# Altium PCB VFD_controller.PcbDoc
Units mm, origin at the board's own origin, x right, y up, seen from the top; angles counter-clockwise.
Board outline 57.92 x 97.6 mm, 4 copper layers (L1, GND, PWR, L2), stack 1.57 mm thick; 61 components, 83 nets, 293 pads, 89 vias.
Unrouted connection lines stored in the file: 5.
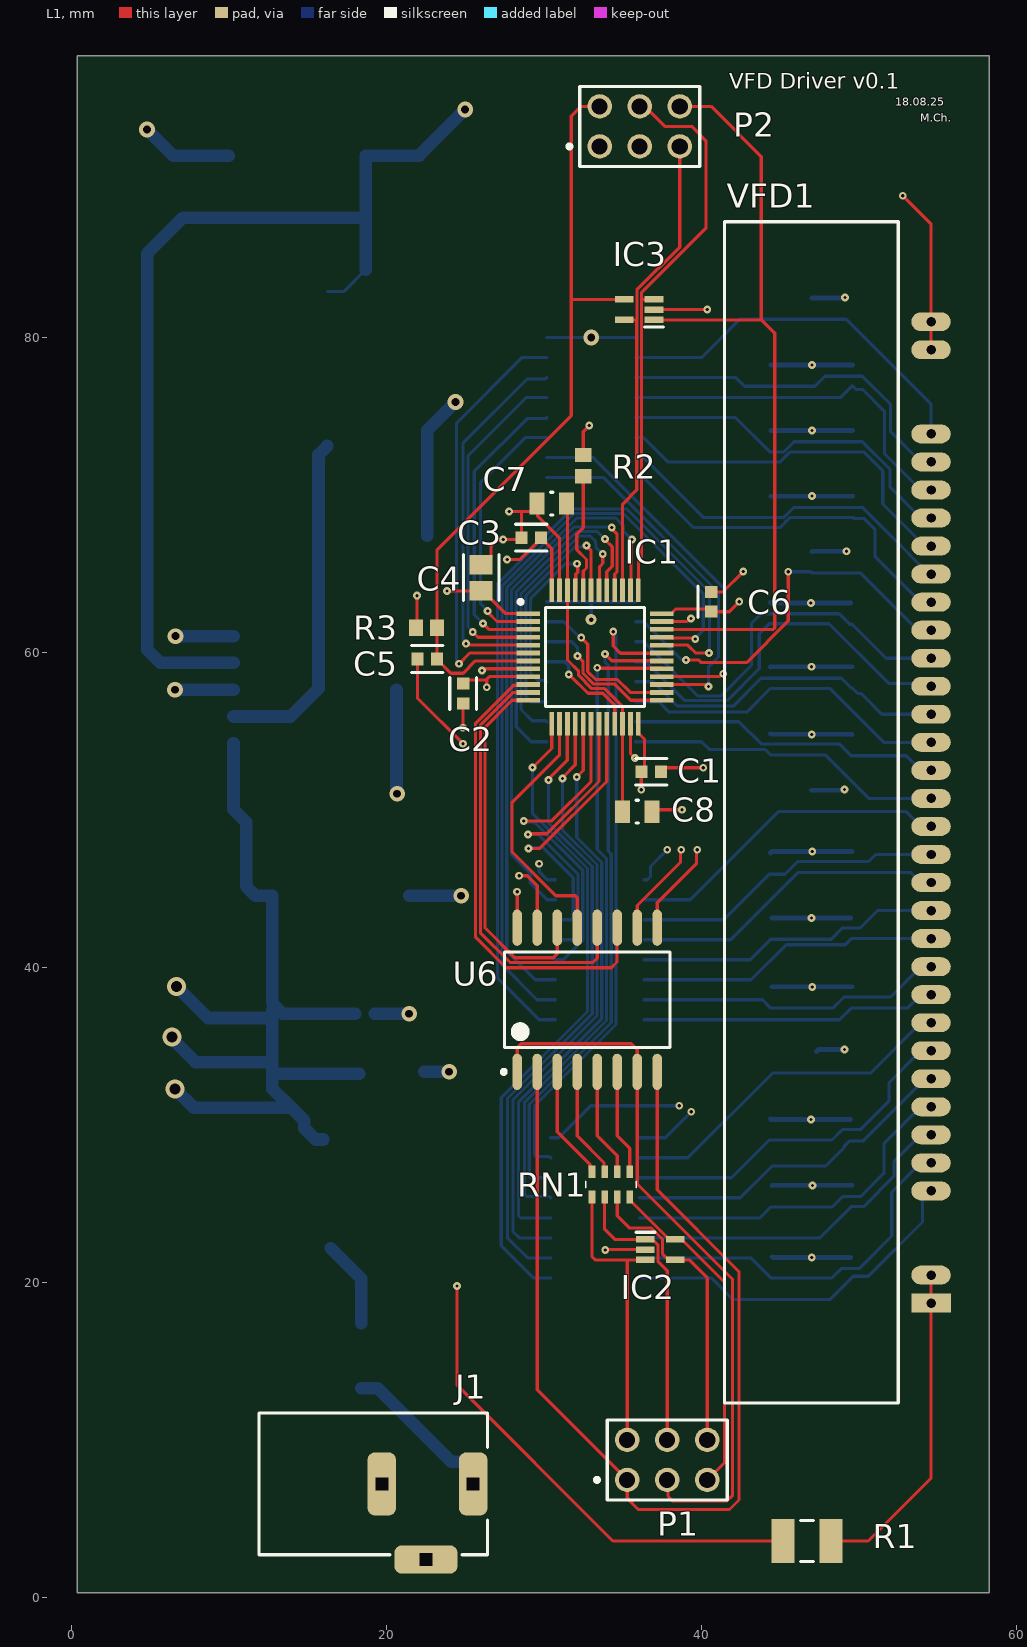
[diagram p0: L1 view]
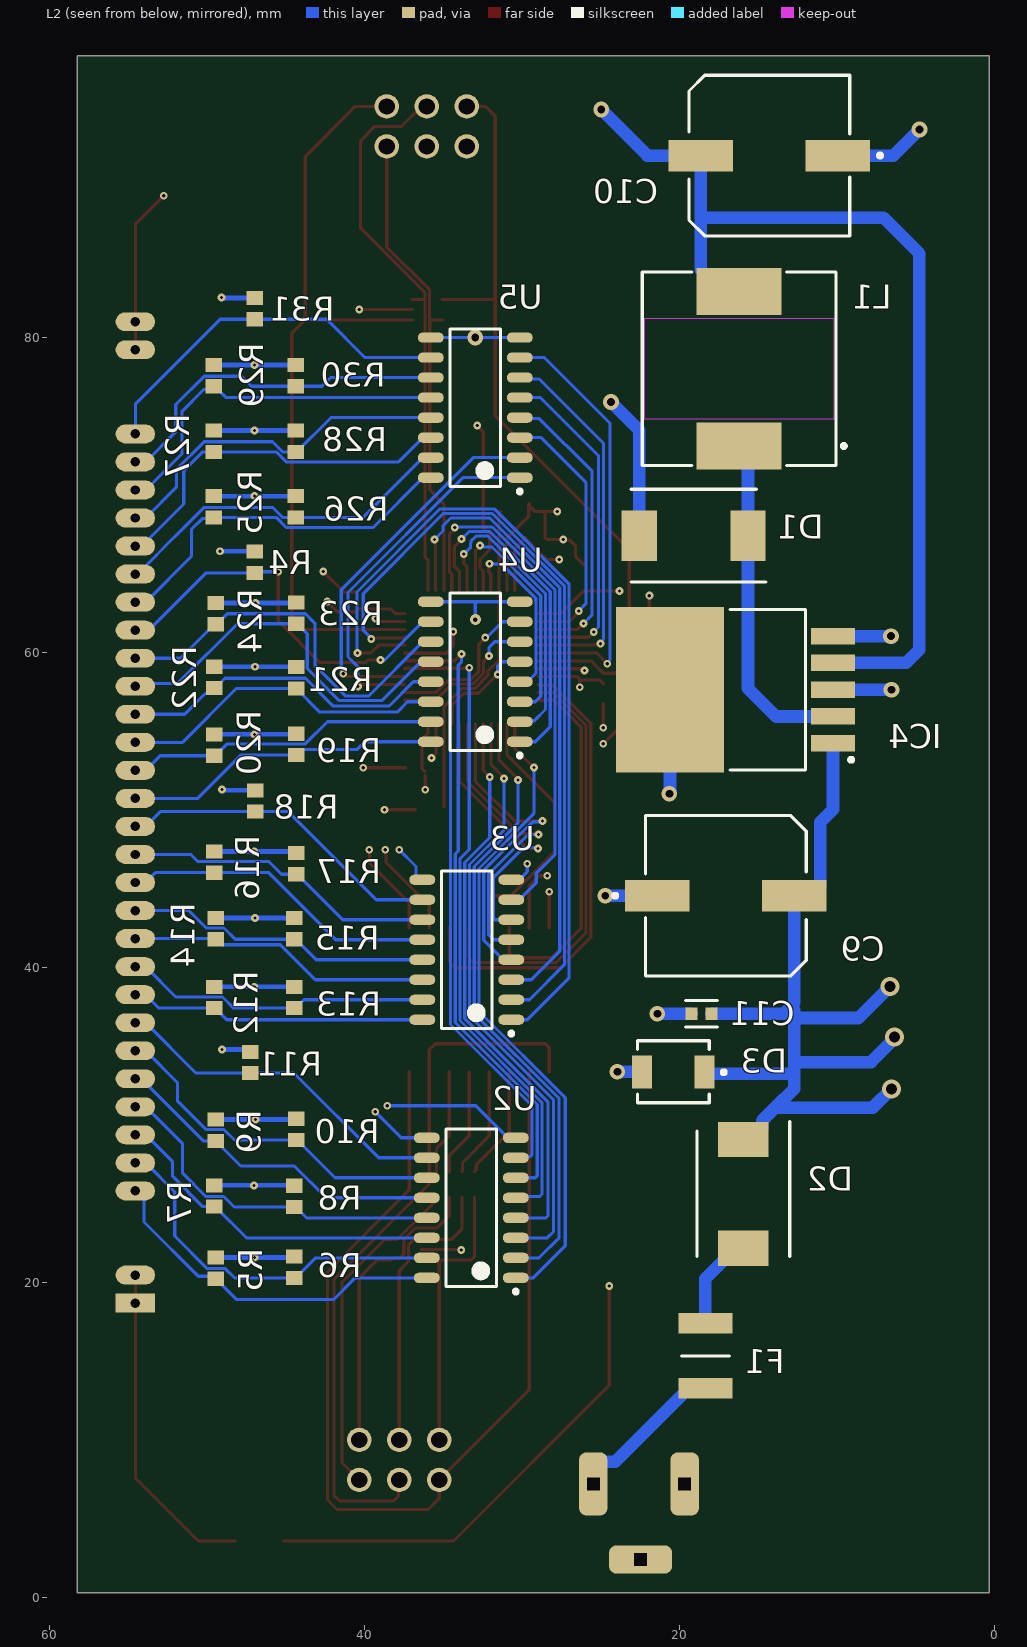
[diagram p1: L2 view, seen from below]
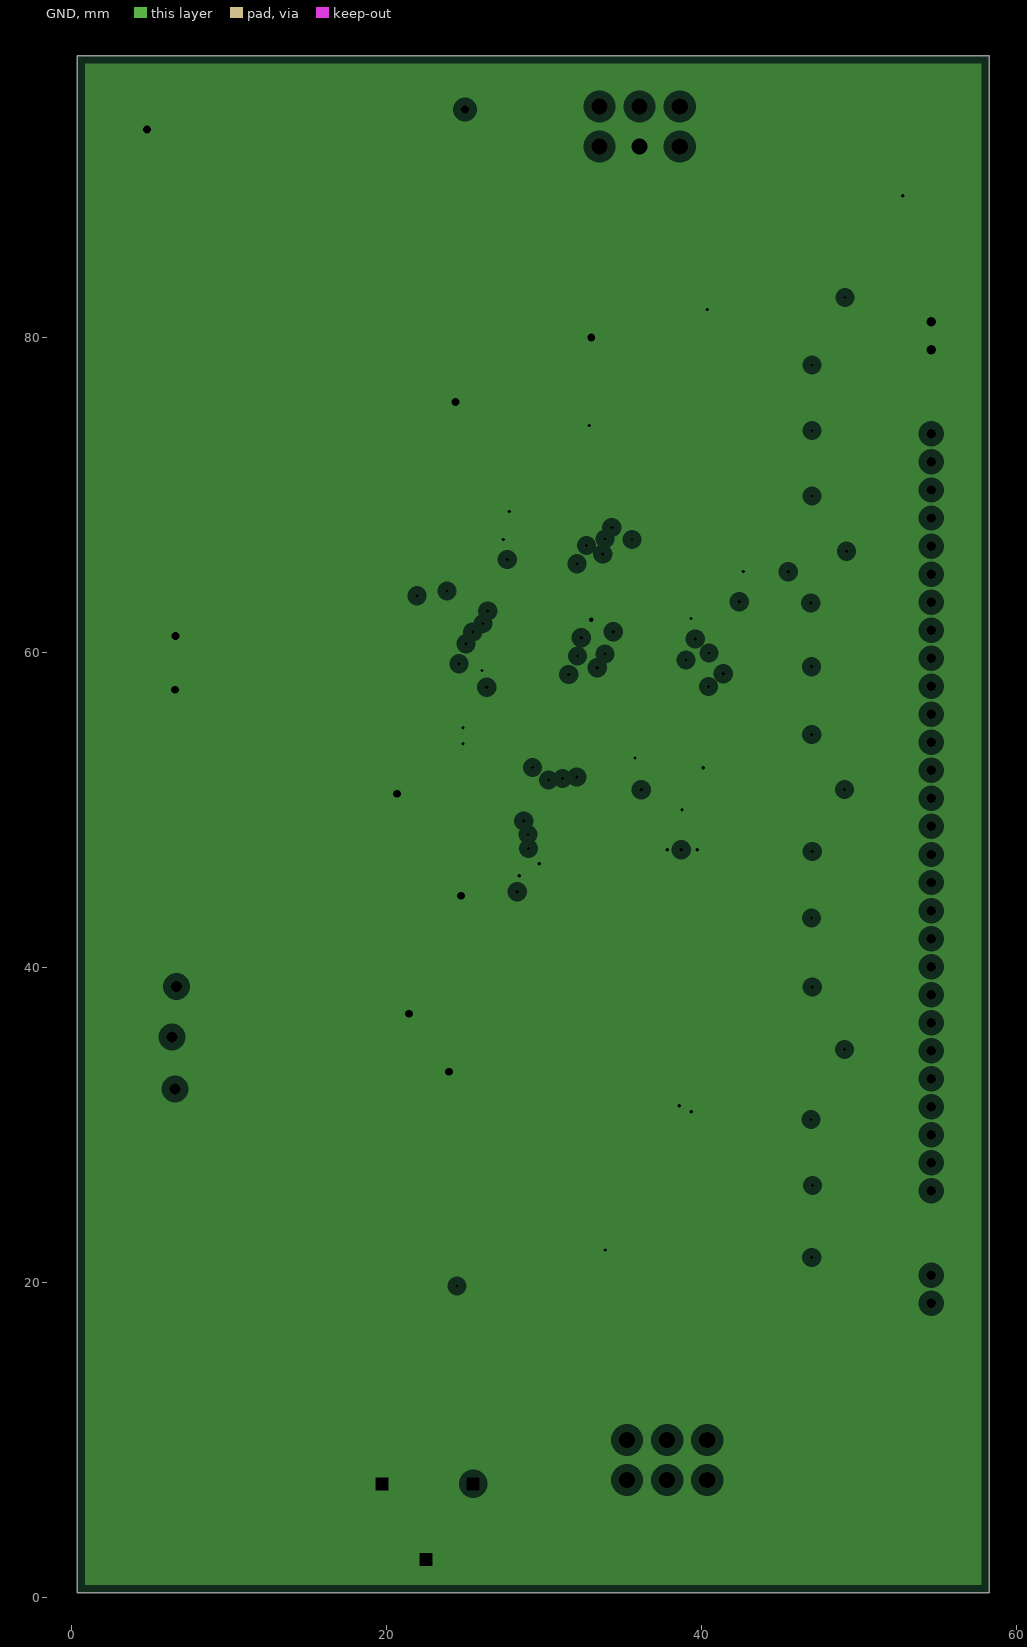
[diagram p2: GND, clearances drawn from the general rule]
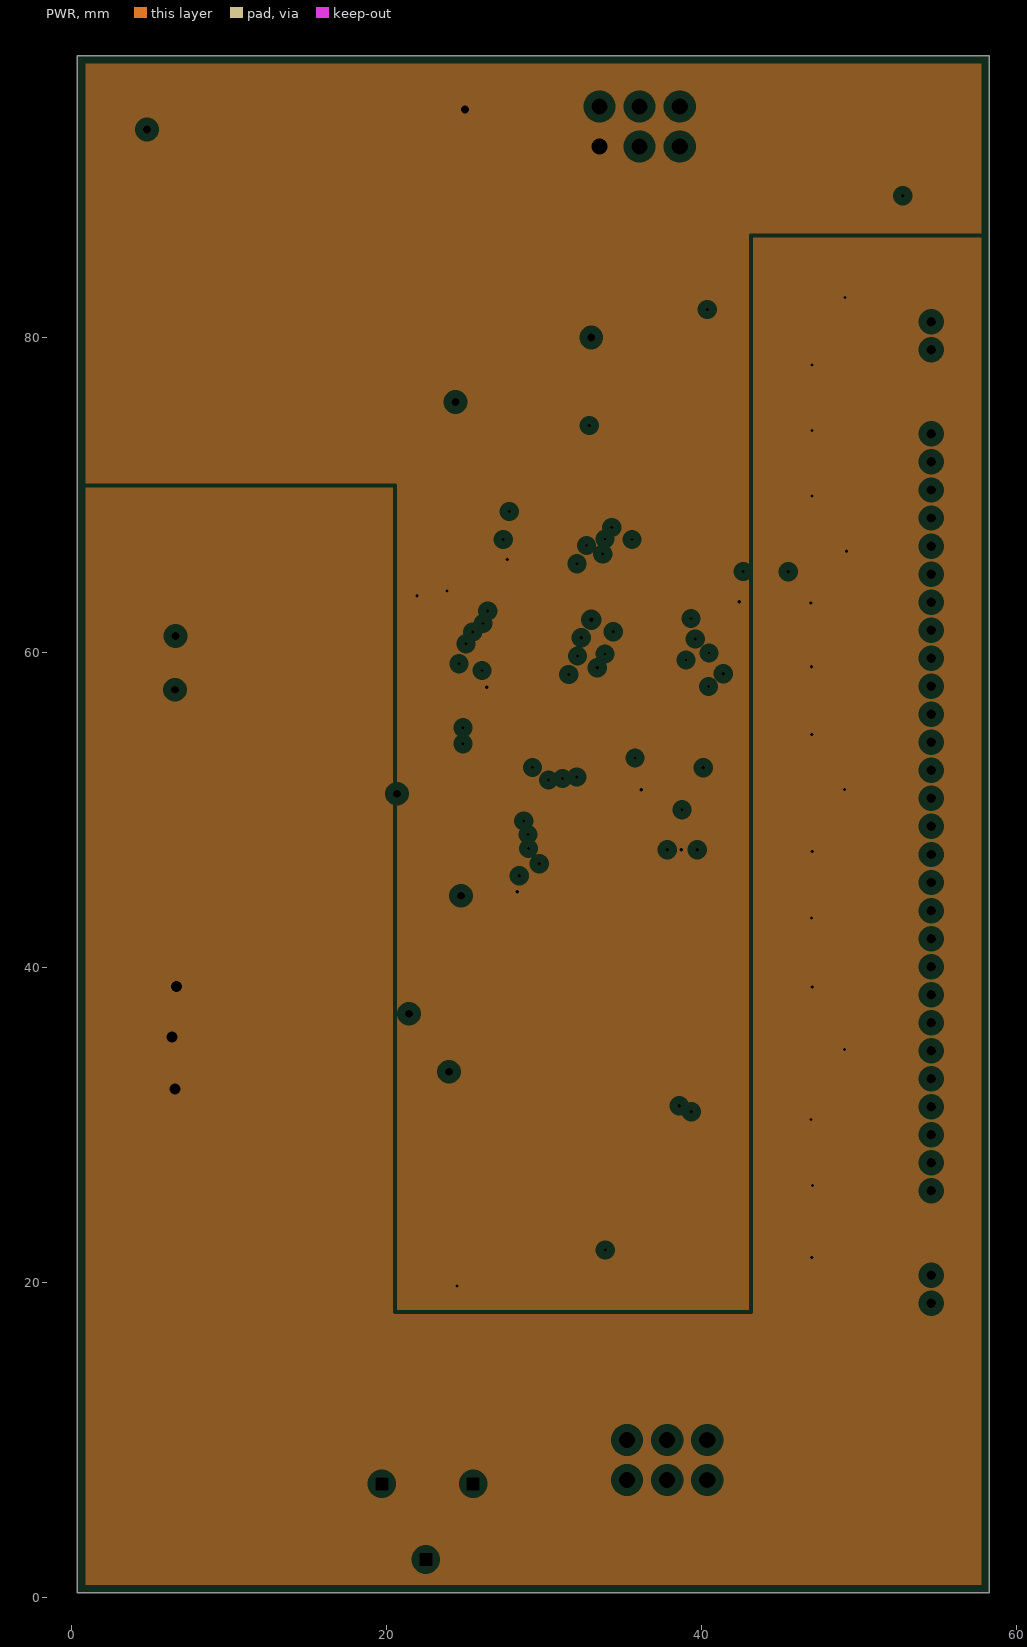
[diagram p3: PWR, clearances drawn from the general rule]
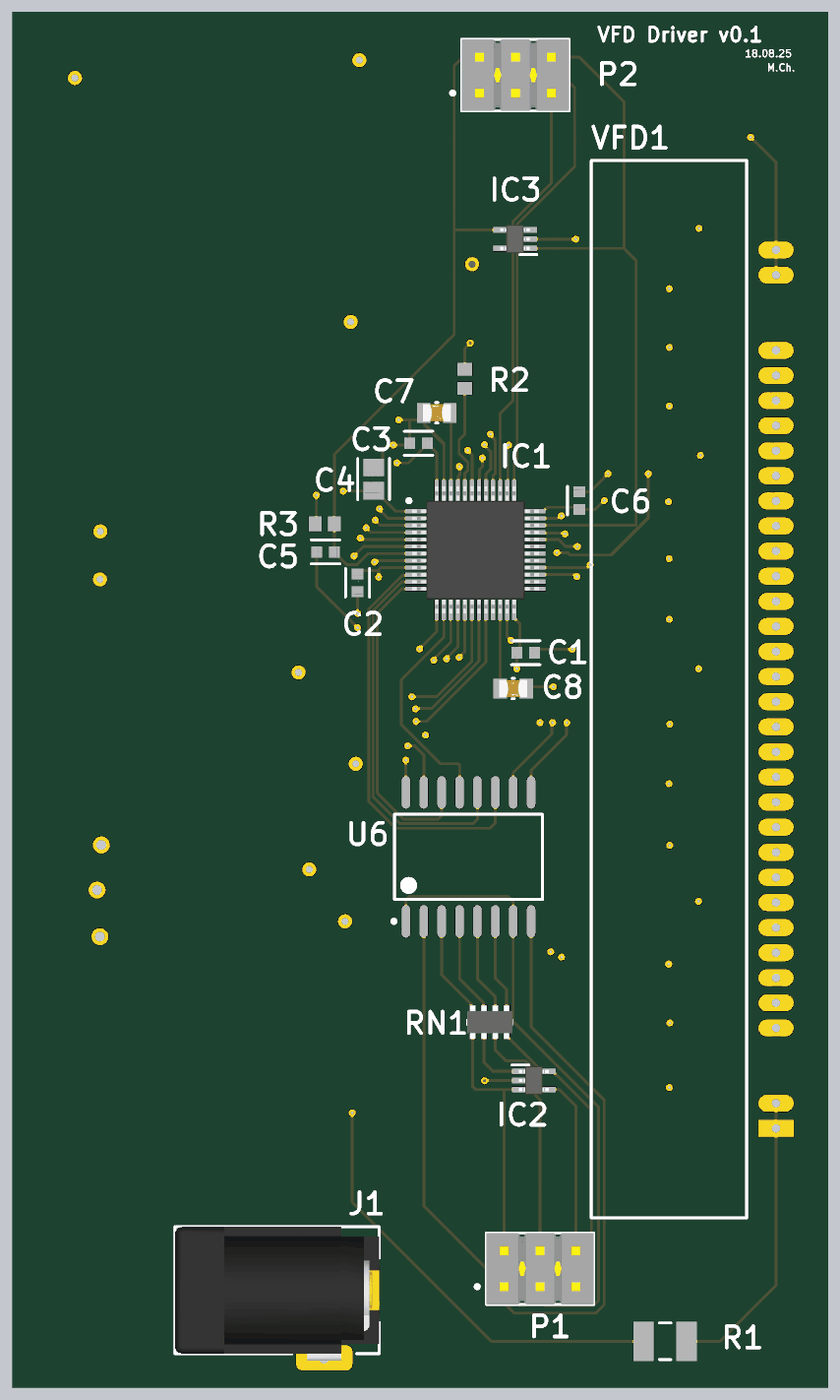
[diagram p4: 3D render of the assembled board from above, using the file's embedded part models]

## Layer stack, top to bottom
Top Solder: solder mask 0.0127, Solder Resist, Dk 3.8
L1: signal copper 0.035
Dielectric 1: prepreg 0.2, 7628, Dk 4.6
GND: plane copper 0.0175, net GND
Core: core 1.065, FR-4, Dk 4.5
PWR: plane copper 0.0175, net (Multiple Nets)
Dielectric 2: prepreg 0.2, 7628, Dk 4.6
L2: signal copper 0.035
Bottom Solder: solder mask 0.0127, Solder Resist, Dk 3.8

## Board outline
0.349,0.27 58.268,0.27 58.268,97.87 0.349,97.87

## Design rules (kind name [scope] priority, off if disabled: settings)
BoardOutlineClearance [All] p1: gap=0.3 ignorepadtopadclearanceinfootprint=FALSE except(0.4: Arc-SplitBarrior Arc-SplitContinuation Track-SplitBarrior Track-SplitContinuation SMDPad-SplitBarrior SMDPad-SplitContinuation THPad-SplitBarrior THPad-SplitContinuation Via-SplitBarrior Via-SplitContinuation Fill-SplitBarrior Fill-SplitContinuation Poly-SplitBarrior Poly-SplitContinuation Region-SplitBarrior Region-SplitContinuation Text-SplitBarrior Text-SplitContinuation)
Clearance "Clearance Different Nets" [All] p1: gap=0.2 ignorepadtopadclearanceinfootprint=FALSE except(0.089: Arc-Arc Arc-Track Arc-SMDPad Track-Track Track-SMDPad; 0.127: SMDPad-SMDPad SMDPad-Via THPad-Via Via-Via; 0.254: Arc-Via Arc-Text Track-Via Track-Text SMDPad-Text THPad-Text Via-Text Fill-Text Poly-Text Region-Text Text-Text; 0.5: THPad-THPad Via-Hole)
Clearance "Clearance Same Nets" [All] p2: gap=0.2 ignorepadtopadclearanceinfootprint=FALSE except(0.089: Arc-Arc Arc-Track Arc-SMDPad Track-Track Track-SMDPad SMDPad-SMDPad; 0.127: SMDPad-Via THPad-Via; 0.254: Arc-Via Arc-Text Track-Via Track-Text SMDPad-Text THPad-Text Via-Via Via-Text Fill-Text Poly-Text Region-Text Text-Text)
Clearance "Clearance Bottom Layer" [OnLayer('Bottom Layer')] p3: gap=0.203 ignorepadtopadclearanceinfootprint=TRUE except(0.254: Arc-Text Track-Text SMDPad-Text THPad-Text Via-Text Fill-Text Poly-Text Region-Text Text-Text)
Clearance "Clearance Top Layer" [OnLayer('Top Layer')] p4: gap=0.203 ignorepadtopadclearanceinfootprint=TRUE except(0.254: Arc-Text Track-Text SMDPad-Text THPad-Text Via-Text Fill-Text Poly-Text Region-Text Text-Text)
HoleSize [All] p1: absolutevalues=TRUE maxlimit=6.3 minlimit=0.2 maxpercent=80.000 minpercent=20.000
MinimumAnnularRing [All] p1: minimumring=0.13
MinimumSolderMaskSliver [All] p1: minsoldermaskwidth=0.1
PlaneClearance [All] p1: clearance=0.508
PlaneConnect [All] p1: planeconnectstyle=Relief reliefexpansion=0.508 reliefentries=4 reliefconductorwidth=0.254 reliefairgap=0.254
PolygonConnect PolygonConnect_1 [All] p1: thpad.connectstyle=Relief thpad.reliefconductorwidth=0.508 thpad.reliefentries=4 thpad.polygonreliefangle="90 Angle" thpad.airgapwidth=0.254 smdpad.connectstyle=Relief smdpad.reliefconductorwidth=0.508 smdpad.reliefentries=4 smdpad.polygonreliefangle="90 Angle" smdpad.airgapwidth=0.254 via.connectstyle=Direct via.reliefconductorwidth=0.508 via.reliefentries=4 via.polygonreliefangle="90 Angle" via.airgapwidth=0.254
RoutingCorners [All] p1: cornerstyle=Round minsetback=2.54 maxsetback=2.54
RoutingVias [All] p1: holewidth=0.5 width=1 viastyle="Through Hole" minholewidth=0.2 minwidth=0.35 maxholewidth=1 maxwidth=2
SilkToSilkClearance [All] p1: silktosilkclearance=0.1
SilkToSolderMaskClearance [IsPad] p1: minsilkscreentomaskgap=0.1 clearancetoexposedcopper=TRUE
SolderMaskExpansion [All] p1: expansion=0.05 istentingtop=FALSE
SupplyNets "Schematic Supply Nets_6" [InNet('GND_SPI')] p1: voltage=0.000
SupplyNets "Schematic Supply Nets_5" [InNet('+2')] p2: voltage=0.000
SupplyNets "Schematic Supply Nets_4" [InNet('+19')] p3: voltage=0.000
SupplyNets "Schematic Supply Nets_3" [InNet('GND')] p4: voltage=0.000
SupplyNets "Schematic Supply Nets_2" [InNet('+3V3')] p5: voltage=0.000
SupplyNets "Schematic Supply Nets_1" [InNet('VDD_SPI')] p6: voltage=0.000
SupplyNets "Schematic Supply Nets" [InNet('VCAP')] p7: voltage=0.000
Width [All] p1: maxlimit=2.54 minlimit=0.089 preferedwidth=0.381
23 further rules are at their usual default settings.

## Classes and differential pairs
net class I[1..28]: I1 I2 I3 I4 I5 I6 I7 I8 I9 I10 I11 I12 I13 I14 I15 I16 I17 I18 I19 I20 I21 I22 I23 I24 I25 I26 I27 I28

## Components (designator, comment, footprint, x,y, rotation, side; value= is the part's Value field where it differs from the comment)
C1 "100nF X7R" FP-CL10-IPC_C 36.798,52.404 r0 top
C2 "100nF X7R" FP-CL10-IPC_C 24.86,57.365 r270 top
C3 "100nF X7R" FP-CL10-IPC_C 29.186,67.263 r180 top
C4 "4.7uF X5R" FP-CL21-IPC_B 26.003,64.723 r90 top
C5 "100nF X7R" FP-CL10-IPC_C 22.582,59.557 r180 top
C6 "100nF X7R" FP-CL10-IPC_C 40.608,63.191 r90 top
C7 "2.2uF X7R" FP-CC0805-0_85-MFG 30.484,69.422 r180 top value="2.2 uF"
C8 "2.2uF X7R" FP-CC0805-0_85-MFG 35.909,49.864 r0 top value="2.2 uF"
C9 "EEE-FC1V221P" FP-FC-G-MFG 17.081,44.53 r180 bottom
C10 "EEE-FC1V221P" FP-FC-G-MFG 14.319,91.52 r0 bottom
C11 "100nF X7R" FP-CL10-IPC_C 18.629,37.037 r0 bottom
D1 "SS34" DIOM8059X256N 19.124,67.39 r0 bottom
D2 "SS34" DIOM8059X256N 15.97,25.607 r270 bottom
D3 "SMBJ24A" FP-SMBJ-MFG 20.415,33.354 r0 bottom
F1 "0ZCG0110BF2B" FUSC4632X130N 18.383,15.32 r90 bottom
IC1 "STM32H503CBT6" QFP50P900X900X160-48N 33.23,59.69 r0 top
IC2 "ESDALC6V1W5" SOT65P210X110-5N 37.372,22.066 r0 top
IC3 "ESDALC6V1W5" SOT65P210X110-5N 36.036,81.741 r180 top
IC4 "LM2596S-3.3_NOPB" TO170P1435X465-6N 16.478,57.611 r0 bottom
J1 "694106301002" 694106301002 19.145,7.192 r270 top
L1 "784771330" WE-PDA_1260 16.241,77.984 r0 bottom
P1 "TSW-103-08-L-D" SMTC-TSW-103-08-L-D_V 37.814,8.716 r0 top
P2 "TSW-103-08-L-D" SMTC-TSW-103-08-L-D_V 36.068,93.37 r0 top
R1 "ERJ-P14J150U" RESC3225X70X50ML20T20 46.693,3.57 r0 top
R2 "10K" RESC1609X50X30ML10T20 32.48,71.835 r90 top
R3 "10K" RESC1609X50X30ML10T20 22.534,61.548 r180 top
R4 "10K" RESC1609X50X30ML10T20 47,65.7 r270 bottom
R5 "10K" RESC1609X50X30ML10T20 49.468,20.895 r270 bottom
R6 "10K" RESC1609X50X30ML10T20 44.468,20.945 r270 bottom
R7 "10K" RESC1609X50X30ML10T20 49.568,25.47 r270 bottom
R8 "10K" RESC1609X50X30ML10T20 44.468,25.445 r270 bottom
R9 "10K" RESC1609X50X30ML10T20 49.468,29.645 r270 bottom
R10 "10K" RESC1609X50X30ML10T20 44.368,29.695 r270 bottom
R11 "10K" RESC1609X50X30ML10T20 47.268,33.945 r270 bottom
R12 "10K" RESC1609X50X30ML10T20 49.568,38.07 r270 bottom
R13 "10K" RESC1609X50X30ML10T20 44.468,38.07 r270 bottom
R14 "10K" RESC1609X50X30ML10T20 49.468,42.445 r270 bottom
R15 "10K" RESC1609X50X30ML10T20 44.468,42.445 r270 bottom
R16 "10K" RESC1609X50X30ML10T20 49.568,46.67 r270 bottom
R17 "10K" RESC1609X50X30ML10T20 44.368,46.57 r270 bottom
R18 "10K" RESC1609X50X30ML10T20 46.968,50.545 r270 bottom
R19 "10K" RESC1609X50X30ML10T20 44.368,54.145 r270 bottom
R20 "10K" RESC1609X50X30ML10T20 49.568,54.095 r270 bottom
R21 "10K" RESC1609X50X30ML10T20 44.368,58.37 r270 bottom
R22 "10K" RESC1609X50X30ML10T20 49.568,58.395 r270 bottom
R23 "10K" RESC1609X50X30ML10T20 44.368,62.47 r270 bottom
R24 "10K" RESC1609X50X30ML10T20 49.468,62.445 r270 bottom
R25 "10K" RESC1609X50X30ML10T20 49.6,69.225 r270 bottom
R26 "10K" RESC1609X50X30ML10T20 44.393,69.225 r270 bottom
R27 "10K" RESC1609X50X30ML10T20 49.6,73.385 r270 bottom
R28 "10K" RESC1609X50X30ML10T20 44.393,73.385 r270 bottom
R29 "10K" RESC1609X50X30ML10T20 49.6,77.546 r270 bottom
R30 "10K" RESC1609X50X30ML10T20 44.393,77.546 r270 bottom
R31 "10K" RESC1609X50X30ML10T20 47,81.8 r270 bottom
RN1 "CAT16-101J4LF" CAT16101J4LF 34.239,26.204 r0 top
U2 "ULN2003ADR" D0016A_M 33.242,24.718 r0 bottom
U3 "ULN2003ADR" D0016A_M 33.527,41.101 r0 bottom
U4 "ULN2003ADR" D0016A_M 32.988,58.754 r0 bottom
U5 "ULN2003ADR" D0016A_M 32.988,75.518 r0 bottom
U6 "ADUM1401ARWZ-RL" ADI-RW-16_N 32.734,37.926 r90 top
VFD1 "HLD336WA" DIP72 54.568,18.67 r180 top

## Footprints (in the part's own frame and the unit in brackets; to place one, negate y for a bottom-side part, rotate by r counter-clockwise, add the part's x,y. Pads: shape width x height; smd on the part's side, far side on the other; paste and mask are expansions set on the pad)
694106301002 [mm] "DC Power Jack Right Angled(6.4)"
  rrect50% 4x1.8 hole 0.8 square: 1(0,6.35) 2(0,0.55)
  rrect50% 1.8x4 hole 0.8 square: 3(4.8,3.35)
  silkscreen extent -4.5,-7.25 4.5,7.25, body extent -4.5,-7.25 5,7.25, height 10.75
ADI-RW-16_N [mm] "SOIC, 16-Leads, Body 10.3x7.5mm, Pitch 1.27mm, IPC Medium Density"
  oval 2.3x0.6 smd: 1(-4.575,4.445) 2(-4.575,3.175) 3(-4.575,1.905) 4(-4.575,0.635) 5(-4.575,-0.635) 6(-4.575,-1.905) 7(-4.575,-3.175) 8(-4.575,-4.445) 9(4.575,-4.445) 10(4.575,-3.175) 11(4.575,-1.905) 12(4.575,-0.635) 13(4.575,0.635) 14(4.575,1.905) 15(4.575,3.175) 16(4.575,4.445)
  silkscreen extent -4.7,-5.25 3.03,5.42, body extent -3.8,-5.25 3.8,5.25, height 2.65
CAT16101J4LF [mm]
  rect 0.425x0.8 smd: A1(-1.2,-0.8) A2(-0.4,-0.8) A3(0.4,-0.8) A4(1.2,-0.8) B1(-1.2,0.8) B2(-0.4,0.8) B3(0.4,0.8) B4(1.2,0.8)
  silkscreen extent -1.6,-0.2 1.6,0.2, body extent -1.6,-1.16 1.6,1.16, height 0.6
D0016A_M [mm] "SOIC, 16-Leads, Body 10x4mm, Pitch 1.27mm, IPC Low Density"
  oval 1.65x0.65 smd: 1(-2.825,4.445) 2(-2.825,3.175) 3(-2.825,1.905) 4(-2.825,0.635) 5(-2.825,-0.635) 6(-2.825,-1.905) 7(-2.825,-3.175) 8(-2.825,-4.445) 9(2.825,-4.445) 10(2.825,-3.175) 11(2.825,-1.905) 12(2.825,-0.635) 13(2.825,0.635) 14(2.825,1.905) 15(2.825,3.175) 16(2.825,4.445)
  silkscreen extent -2.95,-5 1.6,5.44, body extent -3,-4.95 3,4.95, height 1.59
DIOM8059X256N [mm]
  rect 2.25x3.2 smd: 1(-3.45,0) 2(3.45,0)
  silkscreen extent -4.57,-2.95 3.98,2.95, body extent -3.98,-2.95 3.98,2.95, height 2.56
DIP72 [mm]
  rect 2.5x1.2 hole 0.6: 1(0,0)
  oval 2.5x1.2 hole 0.6: 2(0,-1.78) 5(0,-7.12) 6(0,-8.9) 7(0,-10.68) 8(0,-12.46) 9(0,-14.24) 10(0,-16.02) 11(0,-17.8) 12(0,-19.58) 13(0,-21.36) 14(0,-23.14) 15(0,-24.92) 16(0,-26.7) 17(0,-28.48) 18(0,-30.26) 19(0,-32.04) 20(0,-33.82) 21(0,-35.6) 22(0,-37.38) 23(0,-39.16) 24(0,-40.94) 25(0,-42.72) 26(0,-44.5) 27(0,-46.28) 28(0,-48.06) 29(0,-49.84) 30(0,-51.62) 31(0,-53.4) 32(0,-55.18) 35(0,-60.52) 36(0,-62.3)
  silkscreen extent 2.08,-68.65 13.12,6.35
FP-CC0805-0_85-MFG [mm]
  rect 0.95x1.4 smd paste+0 mask+0: 1(-0.925,0) 2(0.925,0)
  silkscreen extent -0.08,-0.72 0.08,0.72, body extent -1.6,-1.05 1.6,1.05, height 0.25
FP-CL10-IPC_C [mm]
  rect 0.758x0.812 smd paste+0 mask+0: 1(-0.627,0) 2(0.627,0)
  silkscreen extent -1.01,-0.85 1.01,0.85, body extent -1.11,-0.55 1.11,0.55, height 0.25
FP-CL21-IPC_B [mm]
  rect 1.255x1.456 smd paste+0 mask+0: 1(-0.826,0) 2(0.826,0)
  silkscreen extent -1.45,-1.13 1.45,1.13, body extent -1.7,-0.98 1.7,0.98, height 0.25
FP-FC-G-MFG [mm]
  rect 4.1x2 smd paste+0 mask+0: 1(-4.35,0) 2(4.35,0)
  silkscreen extent -7.15,-5.1 5.1,5.1, body extent -5.8,-5.1 5.8,5.1, height 10.5
FP-SMBJ-MFG [mm]
  rect 1.27x2.1 smd paste+0 mask+0: 1(-1.98,0) 2(1.98,0)
  silkscreen extent -3.32,-1.97 2.28,1.97, body extent -2.7,-1.81 2.7,1.81, height 2.44
FUSC4632X130N [mm]
  rect 1.31x3.43 smd: 1(-2.065,0) 2(2.065,0)
  silkscreen extent 0,-1.52 0,1.52, body extent -2.27,-1.62 2.27,1.62, height 1.3
QFP50P900X900X160-48N [mm]
  rect 1.475x0.3 smd: 1(-4.238,2.75) 2(-4.238,2.25) 3(-4.238,1.75) 4(-4.238,1.25) 5(-4.238,0.75) 6(-4.238,0.25) 7(-4.238,-0.25) 8(-4.238,-0.75) 9(-4.238,-1.25) 10(-4.238,-1.75) 11(-4.238,-2.25) 12(-4.238,-2.75) 25(4.238,-2.75) 26(4.238,-2.25) 27(4.238,-1.75) 28(4.238,-1.25) 29(4.238,-0.75) 30(4.238,-0.25) 31(4.238,0.25) 32(4.238,0.75) 33(4.238,1.25) 34(4.238,1.75) 35(4.238,2.25) 36(4.238,2.75)
  rect 0.3x1.475 smd: 13(-2.75,-4.238) 14(-2.25,-4.238) 15(-1.75,-4.238) 16(-1.25,-4.238) 17(-0.75,-4.238) 18(-0.25,-4.238) 19(0.25,-4.238) 20(0.75,-4.238) 21(1.25,-4.238) 22(1.75,-4.238) 23(2.25,-4.238) 24(2.75,-4.238) 37(2.75,4.238) 38(2.25,4.238) 39(1.75,4.238) 40(1.25,4.238) 41(0.75,4.238) 42(0.25,4.238) 43(-0.25,4.238) 44(-0.75,4.238) 45(-1.25,4.238) 46(-1.75,4.238) 47(-2.25,4.238) 48(-2.75,4.238)
  silkscreen extent -4.85,-3.15 3.15,3.62, body extent -4.5,-4.5 4.5,4.5, height 1.41
RESC1609X50X30ML10T20 [mm] "Chip Resistor, 2-Leads, Body 1.55x0.85mm, IPC Low Density"
  rect 0.9x1.05 smd: 1(-0.675,0) 2(0.675,0)
  body extent -0.82,-0.48 0.82,0.48, height 0.5
RESC3225X70X50ML20T20 [mm] "Chip Resistor, 2-Leads, Body 3.20x2.50mm, IPC Low Density"
  rect 1.45x2.8 smd: 1(-1.525,0) 2(1.525,0)
  silkscreen extent -0.4,-1.3 0.4,1.3, body extent -1.7,-1.35 1.7,1.35, height 0.7
SMTC-TSW-103-08-L-D_V [mm] "CONN, 6-Leads, Body 7.62x5.08mm, Pitch 2.54mm"
  round 1.55 hole 1.02: 1(-2.54,-1.27) 2(-2.54,1.27) 3(0,-1.27) 4(0,1.27) 5(2.54,-1.27) 6(2.54,1.27)
  silkscreen extent -4.58,-2.54 3.81,2.54, body extent -3.81,-2.54 3.81,2.54, height 8.38
SOT65P210X110-5N [mm]
  rect 1.2x0.4 smd: 1(-0.95,0.65) 2(-0.95,0) 3(-0.95,-0.65) 4(0.95,-0.65) 5(0.95,0.65)
  silkscreen extent -1.55,1.1 -0.35,1.1, body extent -1.05,-1 1.05,1, height 1.1
TO170P1435X465-6N [mm]
  rect 2.8x1.05 smd: 1(-6.2,3.4) 2(-6.2,1.7) 3(-6.2,0) 4(-6.2,-1.7) 5(-6.2,-3.4)
  rect 6.85x10.5 smd: 6(4.15,0)
  silkscreen extent -7.47,-5.1 0.35,5.1, body extent -7.16,-5.08 7.14,5.08, height 4.72
WE-PDA_1260 [mm] "SMD Shielded Power Inductor, 2-leads, body 12x12mm"
  rect 5.4x3 smd: 1(0,4.9) 2(0,-4.9)
  L1 keep-out region: -6,3.2 6,3.2 6,-3.2 -6,-3.2
  silkscreen extent -6.77,-6.15 6.15,6.15, body extent -6,-6 6,6, height 5.9

## Part data
C1 C2 C3 C5 C6 C11: library part CMP-13271-001423-1, "Cap Ceramic 100nF 25V X7R ±10% Pad SMD 0603 +125°C T/R", Capacitance=100nF, Case Code (Imperial)=0603, Case Code (Metric)=1608, Dielectric=X7R, Max Operating Temperature=125°C, Min Operating Temperature=-55°C, Tolerance=10%, Voltage Rating=25V, Case/Package=0603, Depth=0.8mm, Height=0.8mm, Length=1.6mm, Mount="Surface Mount", Packaging="Tape and Reel", Radiation Hardening=No, Thickness=0.035inch, Width=0.031inch
C4: library part CMP-13271-001343-1, "CL21 Series 0805 4.7uF 6.3V ±10% Tolerance X5R Multilayer Ceramic Chip Capacitor", Capacitance=4.7uF, Case/Package=0805, Dielectric=X5R, Max Operating Temperature=85°C, Min Operating Temperature=-55°C, Package Quantity=10000, Tolerance=10%, Voltage Rating=6.3V, Depth=1.25mm, Height=1.25mm, Length=2mm, Mount="Surface Mount", Packaging="Tape and Reel", Radiation Hardening=No, Thickness=0.053inch, Width=0.049inch
C7 C8: library part CMP-03422-000945-1, "CAP CER 2.2UF 6.3V X7R 0805", Capacitance="2.2 uF", Manufacturer=Yageo, Manufacturer Part Number=CC0805KKX7R5BB225, Package=CC0805-0.85, Temperature="-30°C to +85°C", Temperature Characteristic=X7R, Temperature Range High=+85°C, Temperature Range Low=-30°C, Tolerance=0.1, Voltage Rating="6.3 V", Automotive=No, Category=Cap, ComponentLink2Description=Datasheet, ComponentLink2URL=http://www.yageo.com/documents/recent/UPY-GPHC_Y5V_6.3V-to-50V_8.pdf, Device Class L1="Passive Components", Device Class L2=Capacitors, Device Class L3="Ceramic Capacitors", Digikey Description="CAP CER 2.2UF 6.3V X7R 0805", Footprint Url=http://www.yageo.com/exep/pages/download/literatures/UPY-C_GEN_24.pdf, Height=0.95mm, Ipc Land Pattern Name=CAPC200125X85, Lead Free=Yes, Material=Ceramic, Mouser Description="Multilayer Ceramic Capacitors MLCC - SMD/SMT 2.2uF 6.3V X7R 10%", Octopart=https://octopart.com/cc0805kkx7r5bb225-yageo-29810442, RoHS=TRUE
C9 C10: library part CMP-05427-002152-1, "CAP ALUM 220UF 20% 35V SMD", Capacitance=220uF, Case/Package=Radial, ESR (Equivalent Series Resistance)=150mR, Leakage Current=3uA, Max Operating Temperature=105°C, Min Operating Temperature=-40°C, Package Quantity=500, Ratings=AEC-Q200, Ripple Current=670mA, Tolerance=20%, Voltage=35V, Construction=Cylindrical, Contact Plating=Tin, Diameter=10mm, Height=10.2mm, Height - Seated (Max)=0.402inch, Impedance=150mR, Lead Free="Lead Free", Length=10.5mm, Life (Hours)=1000Hour, Material=Aluminium, Mount="Surface Mount", Packaging="Tape and Reel", Radiation Hardening=No, Reach SVHC Compliant=Yes, Ripple Current (AC)=670mA, RoHS Compliant=Yes, Series=FC, Termination=SMD/SMT, Voltage Rating=35V, Voltage Rating (DC)=35V, Width=900um
D1 D2: "Schottky Diode", Manufacturer_Name=onsemi, Mouser Part Number=512-SS34, Arrow Part Number=SS34, Arrow Price/Stock=https://www.arrow.com/en/products/ss34/on-semiconductor?utm_currency=USD&region=nac, Datasheet Link=https://www.onsemi.com/pub/Collateral/SS39-D.PDF, Height=2.56mm, Manufacturer_Part_Number=SS34, Mouser Price/Stock=https://www.mouser.co.uk/ProductDetail/onsemi-Fairchild/SS34?qs=2ONuHmP%2FXzb3ub11UdFfdQ%3D%3D
D3: library part CMP-07401-000035-1, "TVS DIODE 24V 38.9V SMB", Breakdown Voltage=30.7V, Case/Package=SMB, Clamping Voltage=38.9V, Leakage Current=5uA, Max Operating Temperature=150°C, Max Power Dissipation=600W, Max Surge Current=100A, Min Breakdown Voltage=26.7V, Min Operating Temperature=-55°C, Operating Supply Voltage=3.5V, Package Quantity=1, Peak Pulse Current=15.4A, Power Line Protection=No, Resistor Type=Zener, Reverse Standoff Voltage=24V, Test Current=1mA, Diode Type=ZENER, Direction=Unidirectional, Element Configuration=Single, ESD Protection=Yes, Height=2.42mm, Length=4.57mm, Max Breakdown Voltage=30.7V, Max Reverse Leakage Current=5uA, Mount="Surface Mount", Number of Channels=1, Number of Elements=1, Number of Pins=2, Number of Unidirectional Channels=1, Packaging="Tape and Reel", Peak Pulse Power=600W, Polarity=Unidirectional, Radiation Hardening=No, REACH SVHC="No SVHC", Reverse Breakdown Voltage=26.7V, RoHS Compliant=Yes, Series=SMBJ, Termination=SMD/SMT, Width=3.94mm
F1: "Fuse", Manufacturer_Name=BelFuse, Mouser Part Number=530-0ZCG0110BF2B, Arrow Part Number=0ZCG0110BF2B, Arrow Price/Stock=https://www.arrow.com/en/products/0zcg0110bf2b/bel-group, Datasheet Link=https://datasheet.datasheetarchive.com/originals/distributors/Datasheets_SAMA/44944b3a27f8483a7253631e04029a1a.pdf, Height=1.3mm, Manufacturer_Part_Number=0ZCG0110BF2B, Mouser Price/Stock=https://www.mouser.co.uk/ProductDetail/Bel-Fuse/0ZCG0110BF2B?qs=SRYZG9HaIQ2Phb8oqvu9NQ%3D%3D
IC1: "Integrated Circuit", Manufacturer_Name=STMicroelectronics, Mouser Part Number=511-STM32H503CBT6, Arrow Part Number=STM32H503CBT6, Arrow Price/Stock=https://www.arrow.com/en/products/stm32h503cbt6/stmicroelectronics?utm_currency=USD&region=nac, Datasheet Link=https://www.st.com/en/microcontrollers-microprocessors/stm32h503cb.html, Height=1.6mm, Manufacturer_Part_Number=STM32H503CBT6, Mouser Price/Stock=https://www.mouser.co.uk/ProductDetail/STMicroelectronics/STM32H503CBT6?qs=amGC7iS6iy99sz%2FXgeIPHg%3D%3D
IC2 IC3: "Integrated Circuit", Manufacturer_Name=STMicroelectronics, Mouser Part Number=511-ESDALC6V1W5, Arrow Part Number=ESDALC6V1W5, Arrow Price/Stock=https://www.arrow.com/en/products/esdalc6v1w5/stmicroelectronics?utm_currency=USD&region=nac, Datasheet Link=http://www.st.com/web/en/resource/technical/document/datasheet/CD00002946.pdf, Height=1.1mm, Manufacturer_Part_Number=ESDALC6V1W5, Mouser Price/Stock=https://www.mouser.co.uk/ProductDetail/STMicroelectronics/ESDALC6V1W5?qs=C%2FEejvvdwQ4xcyFnfrFaDw%3D%3D
IC4: "Integrated Circuit", Arrow Part Number=LM2596S-3.3/NOPB, Manufacturer_Name="Texas Instruments", Mouser Part Number=926-LM2596S-3.3/NOPB, Arrow Price/Stock=https://www.arrow.com/en/products/lm2596s-3.3nopb/texas-instruments?utm_currency=USD&region=nac, Datasheet Link=http://www.ti.com/lit/ds/symlink/lm2596.pdf, Height=4.65mm, Manufacturer_Part_Number=LM2596S-3.3/NOPB, Mouser Price/Stock=https://www.mouser.co.uk/ProductDetail/Texas-Instruments/LM2596S-3.3-NOPB?qs=X1J7HmVL2ZHsEwG9Q6doow%3D%3D
J1: library part CMP-1502-00188-2, Color=Black, Current Rating=5A, Flammability Rating="UL94 V-0", Insulation Resistance=100MΩ, Max Operating Temperature=85°C, Min Operating Temperature=-40°C, Operating Supply Voltage=24V, Voltage Rating (DC)=20V, Connector Type=Power, Contact Gender=Female, Contact Material="Gold, Tin", Contact Plating=Tin, Gender=Male, Height=11mm, Housing Material=Polyamide, Mount="Through Hole", NexarPartId=52676100, Number of Contacts=3, Packaging=Bulk, REACH SVHC=Unknown, RoHS=Compliant, Shielding=Unshielded, Termination="Through Hole", Voltage Rating=24V
L1: library part CMP-03913-88972560-2, "784771330 Power Inductor, 33Uh, Shielded, 2.8A Rohs Compliant: Yes", Ambient Temperature Range High=85°C, Ambient Temperature Range Low=-40°C, Current Rating=2.8A, DC Resistance (DCR)=52mΩ, Inductance=33µH, Max Operating Temperature=125°C, Height=6mm, Length=12mm, Min Operating Temperature=-40°C, NexarPartId=88972560, Number of Pins=2, RoHS=Compliant, Width=12mm
P1 P2: library part CMP-1024-00336-5, "Male Header, Pitch 2.54 mm, 2 x 3 Position, Height 8.38 mm, Tail Length 5.08 mm, -55 to 125 degC, RoHS, Bulk", Manufacturer=Samtec, Max Operating Temperature="125 degC", Min Operating Temperature="-55 degC", ComponentLink1Description="Manufacturer URL", ComponentLink1URL=http://www.samtec.com/, ComponentLink2Description=Datasheet, ComponentLink2URL=https://datasheet.ciiva.com/25618/0900766b81154476-25618436.pdf, ComponentLink3Description="Package Specification", ComponentLink3URL=http://suddendocs.samtec.com/prints/tsw-xxx-xx-x-x-xx-xxx-footprint.pdf, DatasheetVersion=04/2012, Lead Pitch="2.54 mm", Mount="Through Hole", Mounting Technology="Through Hole", PackageDescription="Male Header, Pitch 2.54 mm, 2 x 3 Position, Height 8.38 mm, Tail Length 5.08 mm", PackageReference=TSW-103-08-L-D, RoHSCompliant=true
R1: library part CMP-2005-03662-1, Manufacturer=Panasonic, Part Number=ERJ-P14J150U
R2 R3 R4 R5 R6 R7 R8 R9 R10 R11 R12 R13 R14 R15 R16 R17 R18 R19 R20 R21 R22 R23 R24 R25 R26 R27 R28 R29 R30 R31: library part CMP-2000-03837-1, Manufacturer="Vishay Dale", Part Number=CRCW060310K0FKTB
RN1: "Resistor Network", Manufacturer_Name=Bourns, Mouser Part Number=652-CAT16-101J4LF, Arrow Part Number=CAT16-101J4LF, Arrow Price/Stock=https://www.arrow.com/en/products/cat16-101j4lf/bourns?region=nac, Datasheet Link=https://datasheet.datasheetarchive.com/originals/distributors/SFDatasheet-7/sf-000140092.pdf, Height=0.5mm, Manufacturer_Part_Number=CAT16-101J4LF, Mouser Price/Stock=https://www.mouser.co.uk/ProductDetail/Bourns/CAT16-101J4LF?qs=Fn3VdHBzkcn2is%252B1oonJSQ%3D%3D
U2 U3 U4 U5: library part CMP-2000-04953-1, "High-Voltage, High-Current Darlington Transistor Array, 0.5 A, 50 V, -20 to 70 degC, 16-Pin SOIC (D), Green (RoHS & no Sb/Br), Tape and Reel", Manufacturer=TexasInstruments, Maximum Collector Emitter Saturation Voltage=1.1@100mA, Maximum Collector Emitter Voltage=50V, Package=16SOIC, Package Description="16-Pin Plastic Small Outline, Body 9.9 x 3.9 mm, Pitch 1.27 mm", Package Reference=D16, Package Version="4040047-6/M, 06/2011", Peak DC Collector Current=0.5A, Category=DarlingtonBJT, Configuration=Array7, Datasheet URL=http://www.ti.com/general/docs/lit/getliterature.tsp?genericPartNumber=uln2003a&fileType=pdf, Datasheet Version="Rev. O, 01/2016", Manufacturer URL=http://www.ti.com/, Mounting=SurfaceMount, Package URL=http://www.ti.com/lit/ml/mpds178g/mpds178g.pdf, Packaging=Tape&Reel, Rad Hard=No, Type=NPN
U6: library part CMP-0534-00564-1, "Quad Channel Digital Isolator, 2.5 KV rms Insulation Rating, 1 Mbps Data Rate, 100 ns Delay, Industrial, 16-pin SOIC (RW-16), Reel", Manufacturer="Analog Devices", Max Operating Temp (degreesC)=125, Code_JEDEC=MS-013-AA, ComponentLink1Description="Manufacturer URL", ComponentLink1URL=http://www.analog.com/en/index.html, ComponentLink2Description=Datasheet, ComponentLink2URL=http://www.analog.com/static/imported-files/data_sheets/ADuM1400_1401_1402.pdf, ComponentLink3Description="Package Specification", ComponentLink3URL=http://www.analog.com/static/imported-files/packages/PKG_PDF/SOIC_WIDE%20%28RW%29/RW_16.pdf, ComponentLink4Description="URL Link1", ComponentLink4URL="Product URL:http://www.analog.com/en/interface-isolation/digital-isolators/adum1401/products/product.html", ComponentLink5Description="URL Link2", ComponentLink5URL="Reference Circuit:http://www.analog.com/en/interface-isolation/digital-isolators/adum1401/products/product.html#product-recommendations", DatasheetVersion="Rev. H", Max Data Rate=1Mbps, Mounting Technology="Surface Mount", PackageDescription="16-Pin Standard Small Outline Package, Body 10.3 x 7.5 mm, Pitch 1.27 mm", PackageReference=RW-16, PackageVersion="032707-B, 03/2007", PartNumber=ADUM1401ARWZ-RL

## Via types
v1: diameter 0.5, hole 0.2, L1 to L2, 75 vias
v2: diameter 1, hole 0.5, L1 to L2, 10 vias
v3: diameter 1.2, hole 0.7, L1 to L2, 3 vias
v4: diameter 0.7, hole 0.3, L1 to L2, 1 vias

## Nets (pads, with @x,y where several pads share a name; then routed paths per layer and width w, separated by ;. In a path a pad name is that pad's centre, name@x,y a point inside that pad or via, vN(x,y) a via of type N, cw(c..) or ccw(c..) an arc to the next point about the centre after c; other vN are vias at no path point)
+2: R1.2 VFD1.1 VFD1.2 | length 20.9
  L1 w0.2: R1.2 50.568,3.57 54.568,7.57 VFD1.1 VFD1.2
+3V3: C1.1 C2.1 C3.1 C4.1 C6.1 C10.2 IC1.1 IC1.9 IC1.24 IC1.36 IC1.48 IC4.4 L1.2 P2.1 R1.1 R3.2 U6.10 U6.16 | length 131.6
  L1 w0.2: R3.2 21.939,61.628 v1(21.939,63.58) ; v1(23.839,63.87) 26.077,63.87 26.104,63.897 27.561,62.44 IC1.1 ; v1(24.479,19.765) 24.479,13.459 34.368,3.57 R1.1 ; C2.1 25.1,58.232 26.315,58.232 26.356,58.273 ; v1(26.356,57.766) 26.356,58.273 ; v1(27.654,65.866) 28.443,65.866 C3.1@29.813,67.236 ; U6.16 v1(28.289,44.784) ; IC1.9 26.523,58.44 26.356,58.273 ; C3.1 C3.1@29.813,67.236 ; IC1.48 30.48,66.569 C3.1@29.813,67.236 ; U6.10 35.909,43.911 38.659,46.661 38.659,47.407 v1(38.703,47.451) ; IC1.24 35.98,54.865 36.368,54.477 36.368,52.601 C1.1 ; v1(36.163,51.261) C1.1@36.163,52.15 ; IC1.36 38.056,62.44 38.341,62.725 40.447,62.725 C6.1 41.751,62.564 v1(42.386,63.199)
  L2 w0.2: L1.2 17.269,82.884 L1.2@18.669,84.284
  L2 w0.8: IC4.4 5.634,59.311 4.794,60.151 4.794,85.297 7.08,87.583 18.669,87.583 ; L1.2@18.669,84.284 18.669,87.583 ; v2(24.987,94.441) 22.066,91.52 C10.2 18.669,87.583
+19: C9.2 C11.1 D2.1 D3.1 IC4.1 R4.1 R5.1 R6.1 R7.1 R8.1 R9.1 R10.1 R11.1 R12.1 R13.1 R14.1 R15.1 R16.1 R17.1 R18.1 R19.1 R20.1 R21.1 R22.1 R23.1 R24.1 R25.1 R26.1 R27.1 R28.1 R29.1 R30.1 R31.1 | length 132.5
  L2 w0.3: R10.1 44.418,30.32 R9.1 ; R17.1 44.468,47.345 R16.1 ; R19.1 44.414,54.774 v1(46.993,54.774) ; R21.1 44.393,59.07 R22.1 ; R23.1 44.393,63.12 R24.1 ; R26.1 R25.1 ; R28.1 R27.1 ; R30.1 R29.1 ; R6.1 44.518,21.57 R5.1 ; R8.1 44.493,26.145 R7.1 ; R13.1 R12.1 ; R15.1 R14.1 ; R18.1 49.018,51.22 v1(49.068,51.27) ; v1@46.993,54.77 46.997,54.774 49.564,54.774 R20.1 ; R4.1 47.025,66.4 v1(49.2,66.4) ; R31.1 49.075,82.475 v1(49.1,82.5) ; R11.1 47.418,34.77 v1(49.068,34.77)
  L2 w0.8: v3(6.368,35.57) 6.368,35.47 7.868,33.97 12.731,33.97 ; v3(6.568,32.27) 7.768,31.07 13.957,31.07 ; v3(6.668,38.77) 8.668,36.77 12.731,36.77 ; IC4.1 10.278,50.01 11.081,49.207 11.081,45.13 11.681,44.53 C9.2 12.731,37.726 13.42,37.037 C11.1 ; 12.731,35.476 12.731,33.97 ; 12.731,37.27 12.731,36.77 ; D2.1 15.495,29.057 14.77,29.782 14.77,30.257 13.957,31.07 ; D3.1@18.256,33.227 12.731,33.227 ; 12.731,33.227 12.731,32.296 13.957,31.07 ; 12.731,33.227 12.731,33.97 ; 12.731,33.97 12.731,36.77
  other v1: 46.993,21.57 47.031,26.145 46.943,30.32 47.018,38.745 46.968,43.12 47.018,47.345 46.981,59.07 46.931,63.12 46.996,69.9 46.996,74.06 46.996,78.221
GND: C1.2 C2.2 C3.2 C4.2 C5.2 C6.2 C7.2 C8.2 C9.1 C10.1 C11.2 D1.2 D3.2 IC1.8 IC1.23 IC1.35 IC1.47 IC2.2 IC3.2 IC4.3 IC4.5 IC4.6 J1.2 J1.3 P2.3 R2.2 U2.8 U2.9 U3.8 U3.9 U4.8 U4.9 U5.8 U5.9 U6.9 U6.15 VFD1.35 VFD1.36 | length 130.4
  L1 w0.2: C5.2 21.955,57.087 v1(24.86,54.182) ; v1(24.86,55.198) C2.2 ; C4.2 26.104,65.549 26.631,66.076 26.631,66.748 26.986,67.103 27.367,67.103 v1(27.4,67.136) 28.432,67.136 C3.2 28.559,68.914 ; v1(26.065,58.836) 26.146,58.836 26.25,58.94 IC1.8 ; v1(27.781,68.914) 28.559,68.914 ; v1(28.416,45.8) 28.924,45.8 29.559,45.165 U6.15 ; IC1.47 30.98,67.232 29.595,68.618 29.595,69.387 C7.2 29.559,69.289 29.184,68.914 28.559,68.914 ; R2.2 32.48,73.994 v1(32.861,74.375) ; v1(33.877,22.051) 33.892,22.066 IC2.2 ; IC1.23 35.48,53.554 v1(35.764,53.27) ; C8.2@36.798,49.991 v1(38.758,49.991) ; IC3.2 v1(40.354,81.741) ; U6.9 37.179,44.081 39.684,46.586 39.684,47.416 v1(39.719,47.451) ; C1.2@37.417,52.658 v1(40.1,52.658) ; IC1.35 39.075,61.94 39.256,62.121 v1(39.331,62.121) ; C6.2 41.354,63.818 v1(42.64,65.104) ; v1(52.768,88.97) 54.568,87.17 VFD1.35
  L2 w0.2: v1(29.686,46.562) 29.686,46.062 30.202,45.546 U3.8 ; U4.8 32.988,63.199 ; U5.8 U5.9 ; U2.8 30.917,29.163 32.949,31.195 v1(38.576,31.195) ; v4(32.988,62.056) 32.988,63.199 ; U4.9 32.988,63.199 ; U2.9 37.687,29.163 v1(39.338,30.814) ; U3.9 36.544,45.546 36.752,45.754 36.752,46.389 v1(37.814,47.451)
  L2 w0.8: v2(4.794,93.171) 6.445,91.52 C10.1 ; v2(6.572,57.611) IC4.3 ; v2(6.601,61.011) IC4.5 ; C11.2 v2(21.431,37.037) ; IC4.6 20.628,51.048 v2(20.669,51.007) ; C9.1 v2(24.733,44.53) ; D3.2 v2(23.971,33.354) ; D1.2 22.574,74.076 v2(24.368,75.87)
  other v2: 32.988,79.963
GND_SPI: P1.1 U6.2 U6.8 | length 66.4
  L1 w0.2: U6.2 29.559,13.161 P1.1 35.274,6.273 35.977,5.57 41.768,5.57 42.368,6.17 42.368,20.67 37.179,25.859 U6.8
I1: IC1.13 U2.1 | length 41.3
  L1 w0.2: v1(29.268,52.67) 30.48,53.882 IC1.13
  L2 w0.2: v1(29.268,52.67) 29.268,49.745 32.75,46.264 32.75,37.18 27.273,31.703 27.273,22.305 29.305,20.273 U2.1
I2: IC1.15 U2.2 | length 39.8
  L1 w0.2: v1(30.268,51.87) 30.268,51.924 31.472,53.128 31.472,55.444 IC1.15
  L2 w0.2: v1(30.268,51.87) 30.268,49.172 33.052,46.389 33.052,37.039 27.668,31.655 27.668,22.818 28.943,21.543 U2.2
I3: IC1.16 U2.3 | length 38.3
  L1 w0.2: v1(31.168,51.97) 31.168,52.024 31.98,52.836 IC1.16
  L2 w0.2: U2.3 28.416,22.813 28.025,23.204 28.025,31.586 33.353,36.914 33.353,46.513 31.168,48.698 v1(31.168,51.97)
I4: IC1.17 U2.4 | length 36.3
  L1 w0.2: v1(32.068,52.07) 32.48,52.482 IC1.17
  L2 w0.2: U2.4 28.5,24.083 28.382,24.2 28.382,31.459 33.655,36.732 33.655,46.638 32.068,48.225 v1(32.068,52.07)
I5: IC1.29 U2.5 | length 41.7
  L1 w0.2: v1(33.369,59.008) 33.403,58.974 37.434,58.974 IC1.29
  L2 w0.2: U2.5 30.343,25.428 28.914,25.428 28.75,25.592 28.75,31.4 33.956,36.607 33.956,46.882 33.369,47.469 v1(33.369,59.008)
I6: IC1.30 U2.6 | length 40.6
  L1 w0.2: v1(33.868,59.87) 34.286,59.452 37.456,59.452 IC1.30
  L2 w0.2: U2.6 29.178,26.623 29.051,26.75 29.051,31.275 34.258,36.482 34.258,47.18 34.068,47.37 34.068,59.163 33.868,59.363 v1(33.868,59.87)
I7: IC1.31 U2.7 | length 40.7
  L1 w0.2: v1(34.385,61.294) 34.385,60.382 34.839,59.928 IC1.31@37.456,59.928
  L2 w0.2: U2.7 30.343,27.968 29.508,27.968 29.391,28.085 29.391,31.188 34.56,36.357 34.56,61.059 34.385,61.234 v1(34.385,61.294)
I8: IC1.32 U3.1 | length 54.5
  L1 w0.2: IC1.32 39.12,60.44 39.62,59.941 v1@40.463,59.941
  L2 w0.2: U3.1 29.686,36.656 27.045,39.297 27.045,64.346 31.789,69.09 35.225,69.09 40.499,63.816 40.499,59.971 v1(40.463,59.935)
I9: IC1.33 U3.2 | length 50.4
  L1 w0.2: IC1.33 37.518,60.89 39.538,60.89 v1(39.592,60.836)
  L2 w0.2: U3.2 29.549,37.926 27.334,40.141 27.334,64.208 31.927,68.801 35.006,68.801 40.1,63.707 40.1,61.375 39.592,60.867 v1(39.592,60.836)
I10: IC1.38 U3.3 | length 40.7
  L1 w0.2: IC1.38 35.52,63.967 35.52,66.99 35.584,67.055 v1(35.584,67.136)
  L2 w0.2: U3.3 29.432,39.196 27.629,41 27.629,64.076 32.064,68.512 34.54,68.512 35.034,68.019 35.034,67.687 v1(35.584,67.136)
I11: IC1.18 U3.4 | length 20.7
  L1 w0.2: v1(28.71,49.285) 30.483,49.285 32.975,51.777 32.975,55.447 IC1.18
  L2 w0.2: v1(28.71,49.285) 28.767,49.228 29.304,49.228 29.413,49.118 29.469,49.118 32.448,46.139 32.448,41.712 31.202,40.466 U3.4
I12: IC1.19 U3.5 | length 19.2
  L1 w0.2: v1(28.979,48.417) 29.025,48.463 30.161,48.463 33.48,51.782 IC1.19@33.48,55.431
  L2 w0.2: v1(28.979,48.417) 28.982,48.42 29.623,48.42 32.147,45.896 32.147,42.056 31.827,41.736 U3.5
I13: IC1.20 U3.6 | length 17.8
  L1 w0.2: v1(29.015,47.534) 29.732,47.534 33.98,51.782 IC1.20
  L2 w0.2: v1(29.015,47.534) 29.063,47.582 29.21,47.582 29.225,47.597 29.921,47.597 31.845,45.673 31.845,43.123 31.728,43.006 U3.6
I14: IC1.40 U3.7 | length 33.3
  L1 w0.2: v1(34.29,67.908) 34.29,67.832 34.633,67.489 34.633,65.107 34.48,64.955 IC1.40
  L2 w0.2: U3.7 30.202,44.276 29.122,45.356 29.122,45.948 27.93,47.14 27.93,63.951 31.924,67.945 34.253,67.945 v1(34.29,67.908)
I15: IC1.41 U4.1 | length 21.9
  L1 w0.2: v1(33.868,67.17) 33.868,67.133 34.325,66.676 34.325,65.442 33.98,65.097 IC1.41
  L2 w0.2: U4.1 29.178,54.309 28.232,55.255 28.232,63.826 32.061,67.656 33.383,67.656 v1(33.868,67.17)
I16: IC1.42 U4.2 | length 19.1
  L1 w0.2: IC1.42 33.522,63.97 33.522,65.424 33.721,65.623 v1(33.721,66.217)
  L2 w0.2: U4.2 30.1,55.642 29.242,55.642 28.533,56.351 28.533,63.701 32.199,67.367 32.931,67.367 33.264,67.034 33.264,66.92 33.285,66.899 33.285,66.653 v1(33.721,66.217)
I17: IC1.43 U4.3 | length 16
  L1 w0.2: v1(32.681,66.763) 32.681,66.741 32.98,66.441 IC1.43
  L2 w0.2: U4.3 29.178,56.849 28.835,57.192 28.835,63.577 31.929,66.67 32.507,66.67 32.6,66.763 v1(32.681,66.763)
I18: IC1.45 U4.4 | length 11.6
  L1 w0.2: IC1.45 32.011,63.959 32.011,64.945 32.132,65.067 32.132,65.563 v1(32.087,65.608)
  L2 w0.2: U4.4 30.089,58.194 29.589,58.194 29.137,58.646 29.137,63.233 29.149,63.246 29.149,63.412 31.337,65.6 32.079,65.6 v1(32.087,65.608)
I19: IC1.21 U4.5 | length 7
  L1 w0.2: v1(31.56,58.566) 31.607,58.566 32.783,57.389 33.718,57.389 34.48,56.627 IC1.21
  L2 w0.2: U4.5 31.318,59.389 31.567,59.141 31.567,58.572 v1(31.56,58.566)
I20: IC1.25 U4.6 | length 9.6
  L1 w0.2: v1(32.109,59.752) 32.476,59.385 32.476,58.638 33.147,57.967 34.476,57.967 35.503,56.94 IC1.25
  L2 w0.2: U4.6 31.751,60.659 32.109,60.301 v1(32.109,59.752)
I21: IC1.26 U4.7 | length 10.2
  L1 w0.2: v1(32.353,60.913) 32.765,60.501 32.765,58.758 33.267,58.256 34.641,58.256 35.457,57.44 IC1.26
  L2 w0.2: U4.7 31.26,61.929 32.276,60.913 v1(32.353,60.913)
I22: IC1.27 U5.1 | length 23.2
  L1 w0.2: IC1.27@37.476,57.948 40.208,57.948 40.347,57.809 v1(40.428,57.809)
  L2 w0.2: U5.1 33.778,71.073 41.067,63.784 41.067,59.685 40.766,59.384 40.766,59.382 40.428,59.044 v1(40.428,57.809)
I23: IC1.28 U5.2 | length 24.2
  L1 w0.2: IC1.28@37.49,58.44 41.136,58.44 41.323,58.627 v1(41.37,58.627)
  L2 w0.2: U5.2 33.115,72.343 41.497,63.961 41.497,58.881 41.428,58.811 41.428,58.684 v1(41.37,58.627)
I24: IC1.2 U5.3 | length 16.6
  L1 w0.2: v1(26.417,62.611) 26.417,62.531 27.008,61.94 IC1.2
  L2 w0.2: v1(26.417,62.611) 25.968,63.06 25.968,70.77 28.811,73.613 U5.3
I25: IC1.3 U5.4 | length 18.9
  L1 w0.2: v1(26.121,61.814) 26.495,61.44 28.98,61.44 IC1.3@28.986,61.446
  L2 w0.2: v1(26.121,61.814) 25.568,62.367 25.568,71.47 28.918,74.82 30.1,74.82 U5.4
I26: IC1.4 U5.5 | length 21.5
  L1 w0.2: v1(25.468,61.27) 25.798,60.94 IC1.4
  L2 w0.2: v1(25.468,61.27) 25.468,61.291 25.168,61.591 25.168,72.47 28.851,76.153 U5.5
I27: IC1.5 U5.6 | length 23.8
  L1 w0.2: v1(25.047,60.532) 25.128,60.532 25.22,60.44 IC1.5
  L2 w0.2: v1(25.047,60.532) 25.047,60.6 24.845,60.801 24.845,73.247 28.935,77.337 30.077,77.337 U5.6
I28: IC1.6 U5.7 | length 27.5
  L1 w0.2: v1(24.606,59.262) 25.284,59.94 IC1.6
  L2 w0.2: v1(24.606,59.262) 24.606,59.333 24.443,59.497 24.443,74.544 28.591,78.693 U5.7
NetD1_1: D1.1 IC4.2 L1.1 | length 21.8
  L2 w0.8: IC4.2 13.889,55.911 15.674,57.696 D1.1 15.674,72.517 L1.1
NetD2_2: D2.2 F1.2 | length 5.6
  L2 w0.8: D2.2@16.445,22.157 18.383,20.219 F1.2
NetF1_1: F1.1 J1.1 | length 10.2
  L2 w0.8: F1.1 19.443,13.255 24.106,8.592 24.999,8.592 25.495,8.096 J1.1
NetIC1_10: IC1.10 U6.11 | length 30.1
  L1 w0.2: IC1.10 28.942,57.89 28.06,57.89 25.654,55.484 25.654,41.884 27.58,39.958 34.258,39.958 34.627,40.326 34.627,42.488 U6.11
NetIC1_11: IC1.11 U6.12 | length 27.3
  L1 w0.2: IC1.11 28.037,57.44 25.956,55.359 25.956,42.183 27.847,40.291 33.09,40.291 33.369,40.571 U6.12
NetIC1_12: IC1.12 U6.14 | length 23.3
  L1 w0.2: IC1.12 27.963,56.94 26.257,55.234 26.257,42.481 28.145,40.593 30.575,40.593 30.829,40.847 U6.14
NetIC1_14: IC1.14 U6.13 | length 16.6
  L1 w0.2: IC1.14 30.98,53.482 27.968,50.47 27.968,47.31 30.748,44.53 31.982,44.53 32.099,44.413 U6.13
NetIC1_34: IC1.34 IC3.1 P2.6 | length 50.8
  L1 w0.2: IC3.1 43.783,81.091 ; IC1.34 44.554,61.44 44.638,61.525 44.638,80.236 43.783,81.091 ; P2.6 40.598,94.64 43.783,91.455 43.783,81.091
NetIC1_37: IC1.37 IC3.3 P2.4 | length 36.2
  L1 w0.2: IC1.37 35.98,65.836 36.189,66.045 36.189,82.37 ; P2.4 36.398,94.64 37.668,93.37 39.368,93.37 40.268,92.47 40.268,86.91 36.189,82.831 36.189,82.37 ; IC3.3 36.21,82.391 36.189,82.37
NetIC1_39: IC1.39 IC3.5 P2.5 | length 30.5
  L1 w0.2: IC1.39 34.98,69.392 35.883,70.295 35.883,81.114 35.86,81.091 IC3.5 ; 35.888,81.114 35.888,82.99 38.608,85.71 P2.5
NetIC1_44: IC1.44 R2.1 | length 7.7
  L1 w0.2: IC1.44 32.48,65.128 32.691,65.339 32.691,65.877 32.068,66.501 32.068,67.486 32.48,67.898 R2.1
NetIC2_1: IC2.1 P1.4 RN1.A2 | length 18.5
  L1 w0.2: RN1.A2 33.839,23.359 34.482,22.716 36.822,22.716 36.922,22.616 36.989,22.616 37.219,22.386 37.219,22.354 37.224,22.35 37.224,21.322 37.814,20.731 P1.4
NetIC2_3: IC2.3 P1.2 RN1.A1 | length 18.7
  L1 w0.2: RN1.A1 33.039,21.619 33.242,21.416 35.274,21.416 ; P1.2 35.274,21.416 ; IC2.3 35.274,21.416
NetIC2_4: IC2.4 P1.6 RN1.A3 | length 19.4
  L1 w0.2: RN1.A3 34.639,24.21 35.401,23.448 36.781,23.448 37.521,22.709 37.521,22.433 37.525,22.428 37.525,21.781 37.79,21.516 38.222,21.516 IC2.4 39.211,21.416 40.354,20.273 P1.6
NetIC2_5: IC2.5 P1.5 RN1.A4 | length 21.4
  L1 w0.2: RN1.A4 35.439,25.217 37.822,22.834 37.822,22.816 37.922,22.716 38.722,22.716 41.458,19.98 41.458,8.55 P1.5
NetRN1_B1: RN1.B1 U6.3 | length 7.3
  L1 w0.2: U6.3 30.829,29.544 32.927,27.447 32.927,27.117 RN1.B1
NetRN1_B2: RN1.B2 U6.4 | length 7.1
  L1 w0.2: U6.4 32.099,29.29 33.802,27.587 33.802,27.041 RN1.B2
NetRN1_B3: RN1.B3 U6.5 | length 6.9
  L1 w0.2: U6.5 33.369,29.29 34.639,28.02 RN1.B3
NetRN1_B4: RN1.B4 U6.6 | length 6.7
  L1 w0.2: U6.6 34.639,29.29 35.439,28.49 RN1.B4
NRST: C5.1 IC1.7 IC3.4 P2.2 R3.1 | length 49.9
  L1 w0.2: IC1.7 25.638,59.44 24.856,58.658 24.081,58.658 23.209,59.53 R3.1 23.209,66.501 31.718,75.01 31.718,82.391 ; P2.2 32.338,94.64 31.718,94.02 31.718,82.391 ; IC3.4 31.718,82.391
ULN_O_1: R5.2 U2.16 VFD1.5 | length 22.8
  L2 w0.2: U2.16 40.602,20.273 41.988,18.888 48.136,18.888 49.618,20.37 50.568,20.37 54.018,23.82 54.018,25.328 54.48,25.79 VFD1.5
ULN_O_2: R6.2 U2.15 VFD1.6 | length 23.7
  L2 w0.2: U2.15 43.12,21.543 44.393,20.27 R6.2 48.276,20.27 48.865,20.859 49.999,20.859 52.068,22.928 52.068,25.72 53.918,27.57 VFD1.6
ULN_O_3: R7.2 U2.14 VFD1.7 | length 21.7
  L2 w0.2: U2.14 47.511,22.813 49.493,24.795 R7.2 50.282,24.795 52.202,26.715 52.202,27.634 53.918,29.35 VFD1.7
ULN_O_4: R8.2 U2.13 VFD1.8 | length 22.5
  L2 w0.2: U2.13 43.706,24.083 44.393,24.77 R8.2 48.301,24.77 48.965,25.434 50.099,25.434 51.568,26.903 51.568,28.78 53.918,31.13 VFD1.8
ULN_O_5: R9.2 U2.12 VFD1.9 | length 21.7
  L2 w0.2: U2.12 42.459,25.353 44.476,27.37 47.868,27.37 49.043,28.545 49.043,28.62 49.393,28.97 R9.2 50.268,28.97 53.727,32.429 53.727,32.448 54.189,32.91 VFD1.9
ULN_O_6: R10.2 U2.11 VFD1.10 | length 22.5
  L2 w0.2: U2.11 41.896,26.623 44.293,29.02 R10.2 48.276,29.02 48.937,29.681 50.072,29.681 51.899,31.509 51.899,32.671 53.918,34.69 VFD1.10
ULN_O_7: R11.2 U2.10 VFD1.11 | length 22.1
  L2 w0.2: U2.10 39.121,27.893 44.498,33.27 R11.2 50.718,33.27 53.918,36.47 VFD1.11
ULN_O_8: R12.2 U3.16 VFD1.12 | length 18.9
  L2 w0.2: U3.16 48.754,36.656 49.493,37.395 R12.2 53.063,37.395 53.918,38.25 VFD1.12
ULN_O_9: R13.2 U3.15 VFD1.13 | length 19.5
  L2 w0.2: U3.15 43.862,37.926 44.393,37.395 R13.2 48.326,37.395 49.037,38.106 51.994,38.106 53.918,40.03 VFD1.13
ULN_O_10: R14.2 U3.14 VFD1.14 | length 19.3
  L2 w0.2: U3.14 43.136,39.196 45.36,41.42 49.118,41.42 R14.2 49.508,41.81 VFD1.14
ULN_O_11: R15.2 U3.13 VFD1.15 | length 19.5
  L2 w0.2: U3.13 43.089,40.466 44.393,41.77 R15.2 48.226,41.77 48.937,42.481 50.072,42.481 51.18,43.59 VFD1.15
ULN_O_12: R16.2 U3.12 VFD1.16 | length 20.2
  L2 w0.2: U3.12 41.842,41.736 43.754,43.648 46.101,45.995 R16.2 53.293,45.995 53.918,45.37 VFD1.16
ULN_O_13: R17.2 U3.11 VFD1.17 | length 19.9
  L2 w0.2: U3.11 41.404,43.006 44.293,45.895 R17.2 45.293,45.895 46.104,46.706 50.604,46.706 51.048,47.15 VFD1.17
ULN_O_14: R18.2 U3.10 VFD1.18 | length 20.9
  L2 w0.2: U3.10 39.274,44.276 44.868,49.87 R18.2 52.978,49.87 53.918,48.93 VFD1.18
ULN_O_15: R19.2 U4.16 VFD1.19 | length 20.2
  L2 w0.2: U4.16 39.988,54.309 40.477,53.82 44.018,53.82 R19.2 47.84,53.47 50.6,50.71 VFD1.19
ULN_O_16: R20.2 U4.15 VFD1.20 | length 20
  L2 w0.2: U4.15 42.367,55.579 43.776,54.17 48.743,54.17 49.493,53.42 R20.2 52.988,53.42 53.918,52.49 VFD1.20
ULN_O_17: R21.2 U4.14 VFD1.21 | length 21.1
  L2 w0.2: U4.14 37.289,56.849 37.948,56.191 42.864,56.191 R21.2 48.143,57.695 51.568,54.27 VFD1.21
ULN_O_18: R22.2 U4.13 VFD1.22 | length 21.1
  L2 w0.2: U4.13 36.919,58.119 38.468,56.57 42.001,56.57 43.765,58.334 48.879,58.334 49.493,57.72 R22.2 49.918,57.37 50.124,57.37 51.444,56.05 VFD1.22
ULN_O_19: R23.2 U4.12 VFD1.23 | length 24.7
  L2 w0.2: U4.12 36.435,59.389 36.586,59.238 36.6,59.238 38.922,56.916 41.614,56.916 43.654,58.956 43.654,61.156 44.293,61.795 R23.2 48.085,61.795 51.872,58.009 54.389,58.009 VFD1.23
ULN_O_20: R24.2 U4.11 VFD1.24 | length 25.1
  L2 w0.2: U4.11 36.313,60.659 39.768,57.205 41.203,57.205 43.168,59.17 43.168,61.837 43.765,62.434 48.729,62.434 49.393,61.77 49.543,61.77 51.703,59.61 VFD1.24
ULN_O_21: R4.2 U4.10 VFD1.25 | length 25.6
  L1 w0.2: v1(39,59.5) 39.813,59.5 39.982,59.331 42.853,59.331 45.5,61.978 v1(45.5,65.1)
  L2 w0.2: U4.10 36.313,61.929 38.742,59.5 v1(39,59.5) ; v1(45.5,65.1) 46.925,65.1 R4.2 50.075,65.025 53.71,61.39 VFD1.25
ULN_O_22: R25.2 U5.16 VFD1.26 | length 23.6
  L2 w0.2: U5.16 36.313,71.073 39.475,67.911 44.996,67.911 45.635,68.55 R25.2 49.679,68.471 50.329,68.471 51,67.8 51,66.088 53.918,63.17 VFD1.26
ULN_O_23: R26.2 U5.15 VFD1.27 | length 22.3
  L2 w0.2: U5.15 36.313,72.343 40.106,68.55 R26.2 45.227,68.55 45.865,69.189 50.203,69.189 51.965,67.427 52.282,67.111 53.197,66.191 ccw(c53.918,66.73) 53.287,66.089 54.442,64.95 VFD1.27
ULN_O_24: R27.2 U5.14 VFD1.28 | length 23.4
  L2 w0.2: U5.14 36.313,73.613 37.855,72.072 44.996,72.072 45.635,72.71 50.29,72.71 51.5,71.5 51.5,69.4 54.17,66.73 VFD1.28
ULN_O_25: R28.2 U5.13 VFD1.29 | length 22.6
  L2 w0.2: U5.13 42.145,74.883 44.318,72.71 R28.2 45.227,72.71 45.865,73.349 50.203,73.349 51.965,71.588 51.965,70.463 53.918,68.51 VFD1.29
ULN_O_26: R29.2 U5.12 VFD1.30 | length 23.4
  L2 w0.2: U5.12 48.807,76.153 49.525,76.871 R29.2 49.8,76.671 50.229,76.671 51.6,75.3 51.6,72.608 53.918,70.29 VFD1.30
ULN_O_27: R30.2 U5.11 VFD1.31 | length 22.5
  L2 w0.2: U5.11 42.177,77.423 42.729,76.871 47.191,76.871 47.83,77.51 50.203,77.51 52,75.713 52,73.988 53.918,72.07 VFD1.31
ULN_O_28: R31.2 U5.10 VFD1.32 | length 23.9
  L2 w0.2: U5.10 39.993,78.693 42.425,81.125 R31.2 49.175,81.125 54.568,75.732 VFD1.32
VCAP: C7.1 C8.1 IC1.22 IC1.46 | length 20.7
  L1 w0.2: C7.1@31.373,68.914 31.388,68.914 31.48,68.822 IC1.46 31.48,59.5 32.187,58.793 32.187,58.519 33.028,57.678 33.838,57.678 34.98,56.536 IC1.22 C8.1@34.98,50.158
VDD_SPI: P1.3 U6.1 U6.7 | length 45.6
  L1 w0.2: U6.1 28.289,34.878 28.543,35.132 35.528,35.132 35.909,34.751 U6.7 35.909,26.229 41.968,20.17 41.968,6.47 41.611,6.112 38.169,6.112 37.952,6.329 37.868,6.414 P1.3

## Polygon pours and split planes (outlines as drawn)
GND on GND (split plane): 57.758,0.781 0.86,0.781 0.86,97.36 57.758,97.36
+19 on PWR (split plane): 57.758,0.781 0.898,0.781 0.898,70.436 20.413,70.436 20.413,18.114 20.423,18.065 20.451,18.023 20.493,17.994 20.542,17.985 43.148,17.985 43.198,17.994 43.24,18.023 43.268,18.065 43.278,18.114 43.278,86.311 57.758,86.311
+3V3 on PWR (split plane): 57.758,86.57 43.148,86.57 43.099,86.56 43.057,86.532 43.029,86.49 43.019,86.44 43.019,18.244 20.672,18.244 20.672,70.565 20.662,70.615 20.634,70.657 20.592,70.685 20.542,70.695 0.898,70.695 0.898,97.36 57.758,97.36

## Other copper
PWR (plane layer: these items are gaps in the copper):
  lines w0.254: 2.268,0.3 0.768,0.3 0.768,70.565 ; 2.508,70.565 0.768,70.565 ; 0.768,70.565 20.542,70.565 20.542,18.114 43.148,18.114 43.148,86.44 58.168,86.44 58.168,97.9 0.768,97.9 0.768,70.565

## Silkscreen, mask and mechanical layers (free items; w line width, h text height)
Top Overlay:
  text "VFD Driver v0.1" at 41.768,95.77 h1
  text "18.08.25" at 52.282,94.67 h0.5
  text "M.Ch." at 53.864,93.67 h0.5